# Altium PCB Main.PcbDoc
Units mil, origin at the board's own origin, x right, y up, seen from the top; angles counter-clockwise.
Board outline 1550 x 1475 mil, 2 copper layers (Top Layer, Bottom Layer); 28 components, 14 nets, 65 pads, 3 vias.
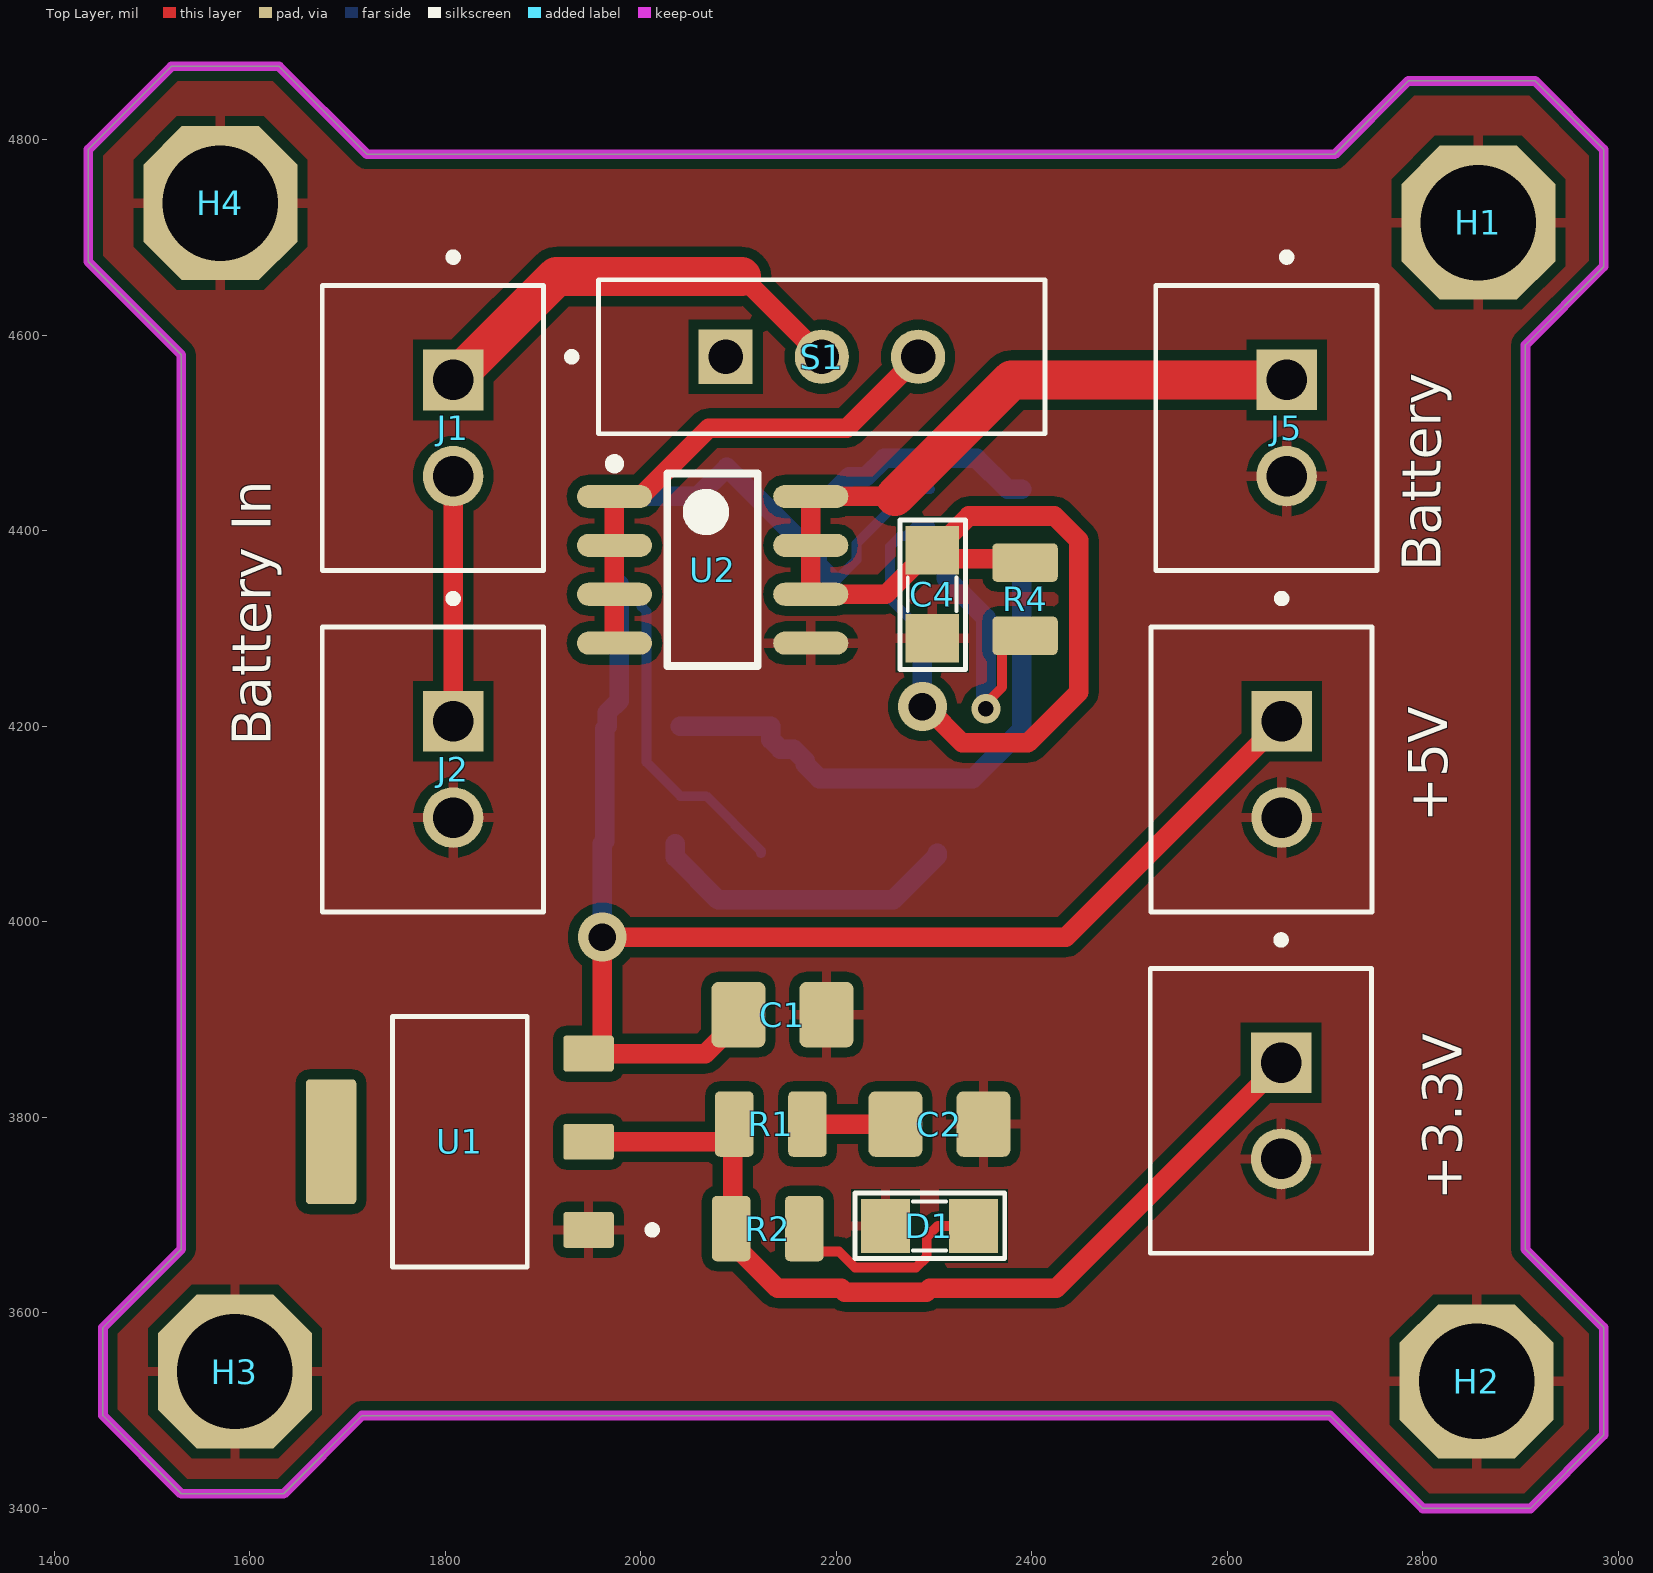
[diagram p0: Top Layer view]
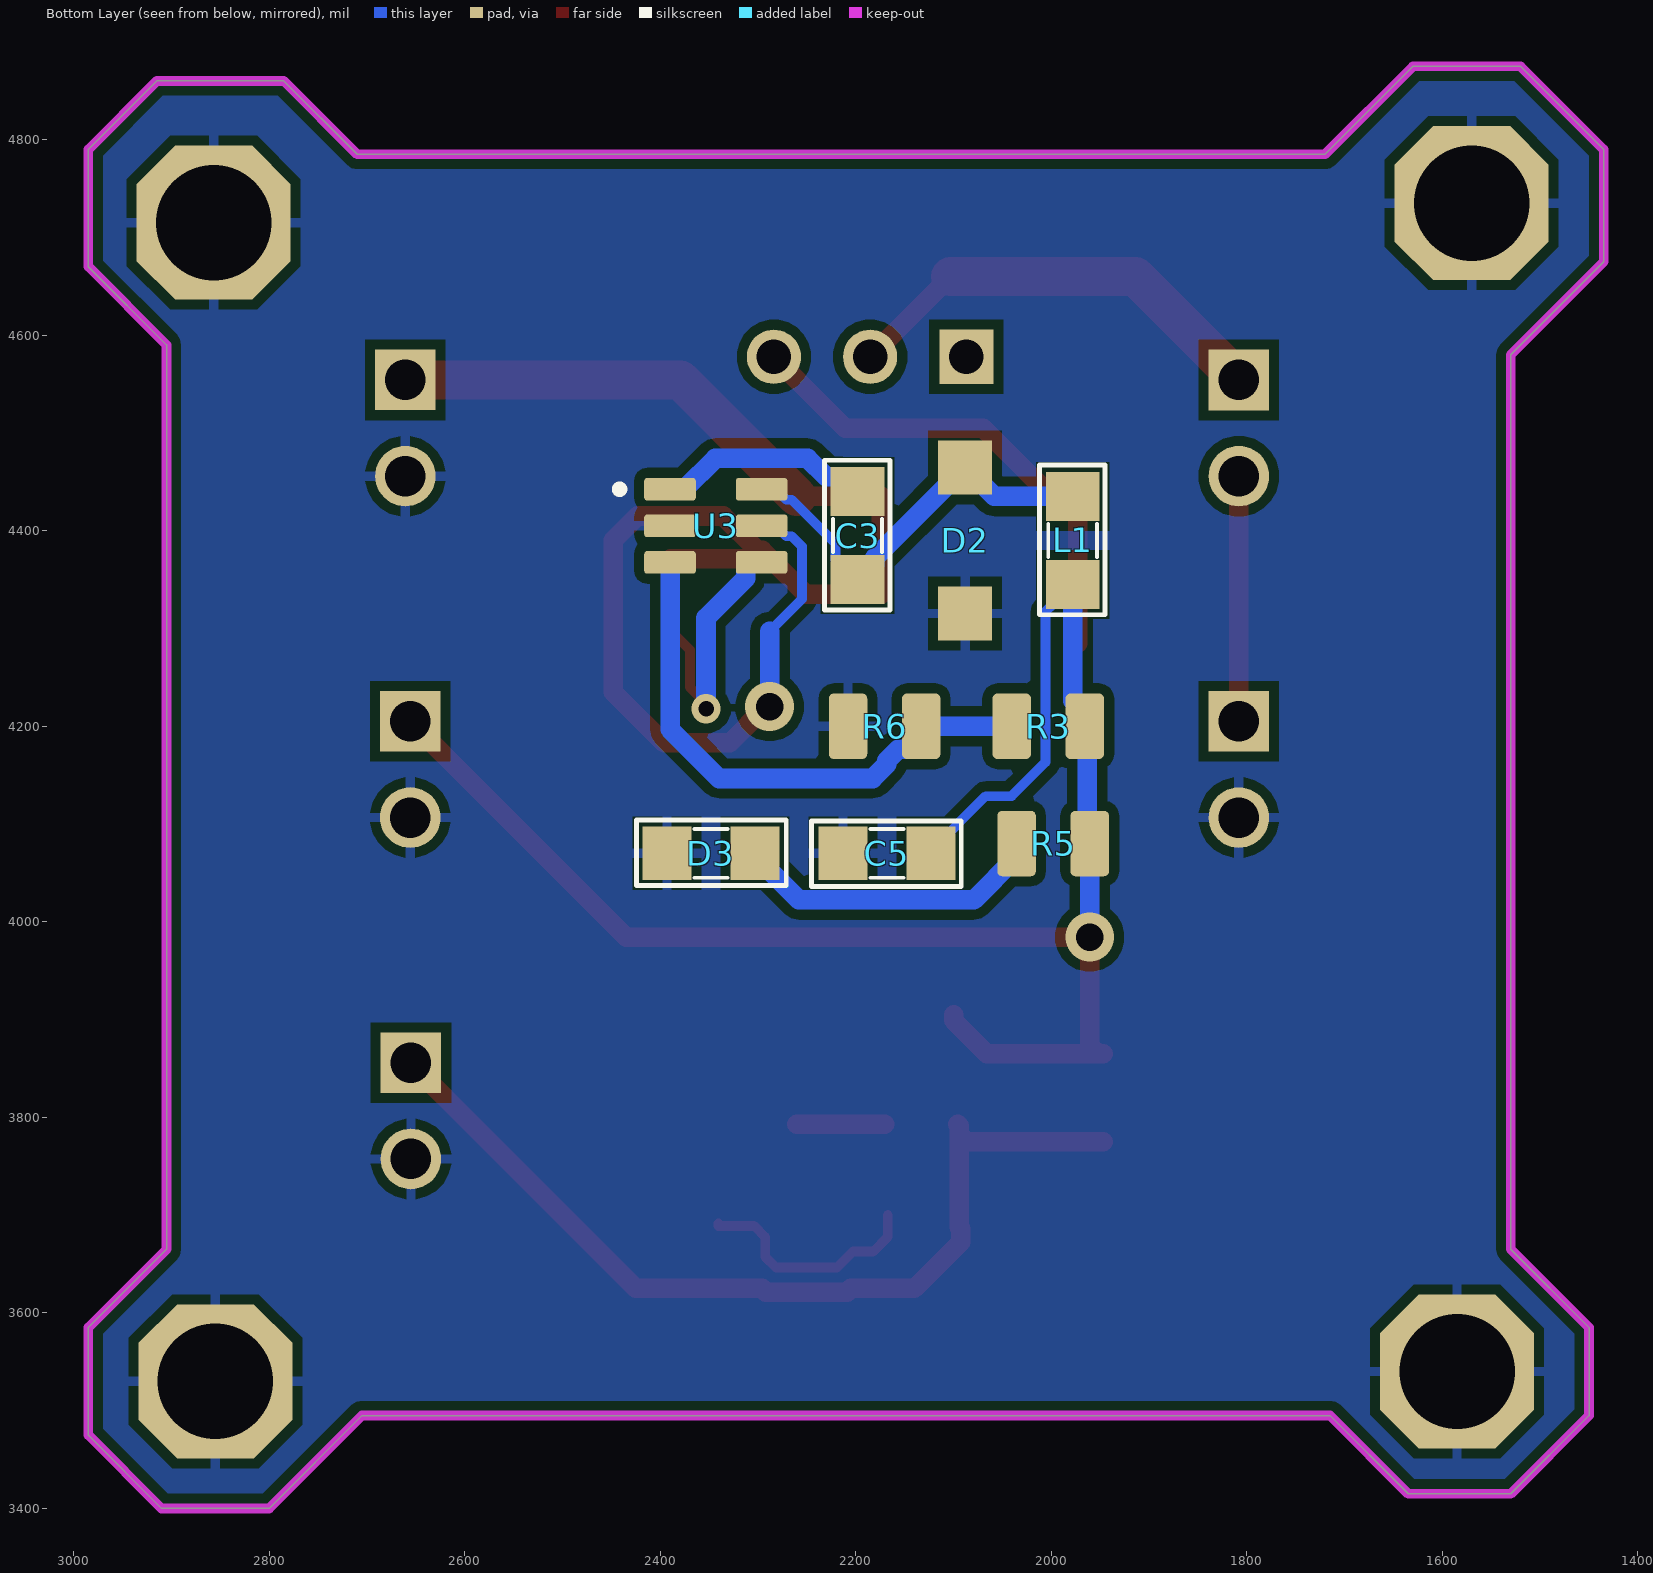
[diagram p1: Bottom Layer view, seen from below]
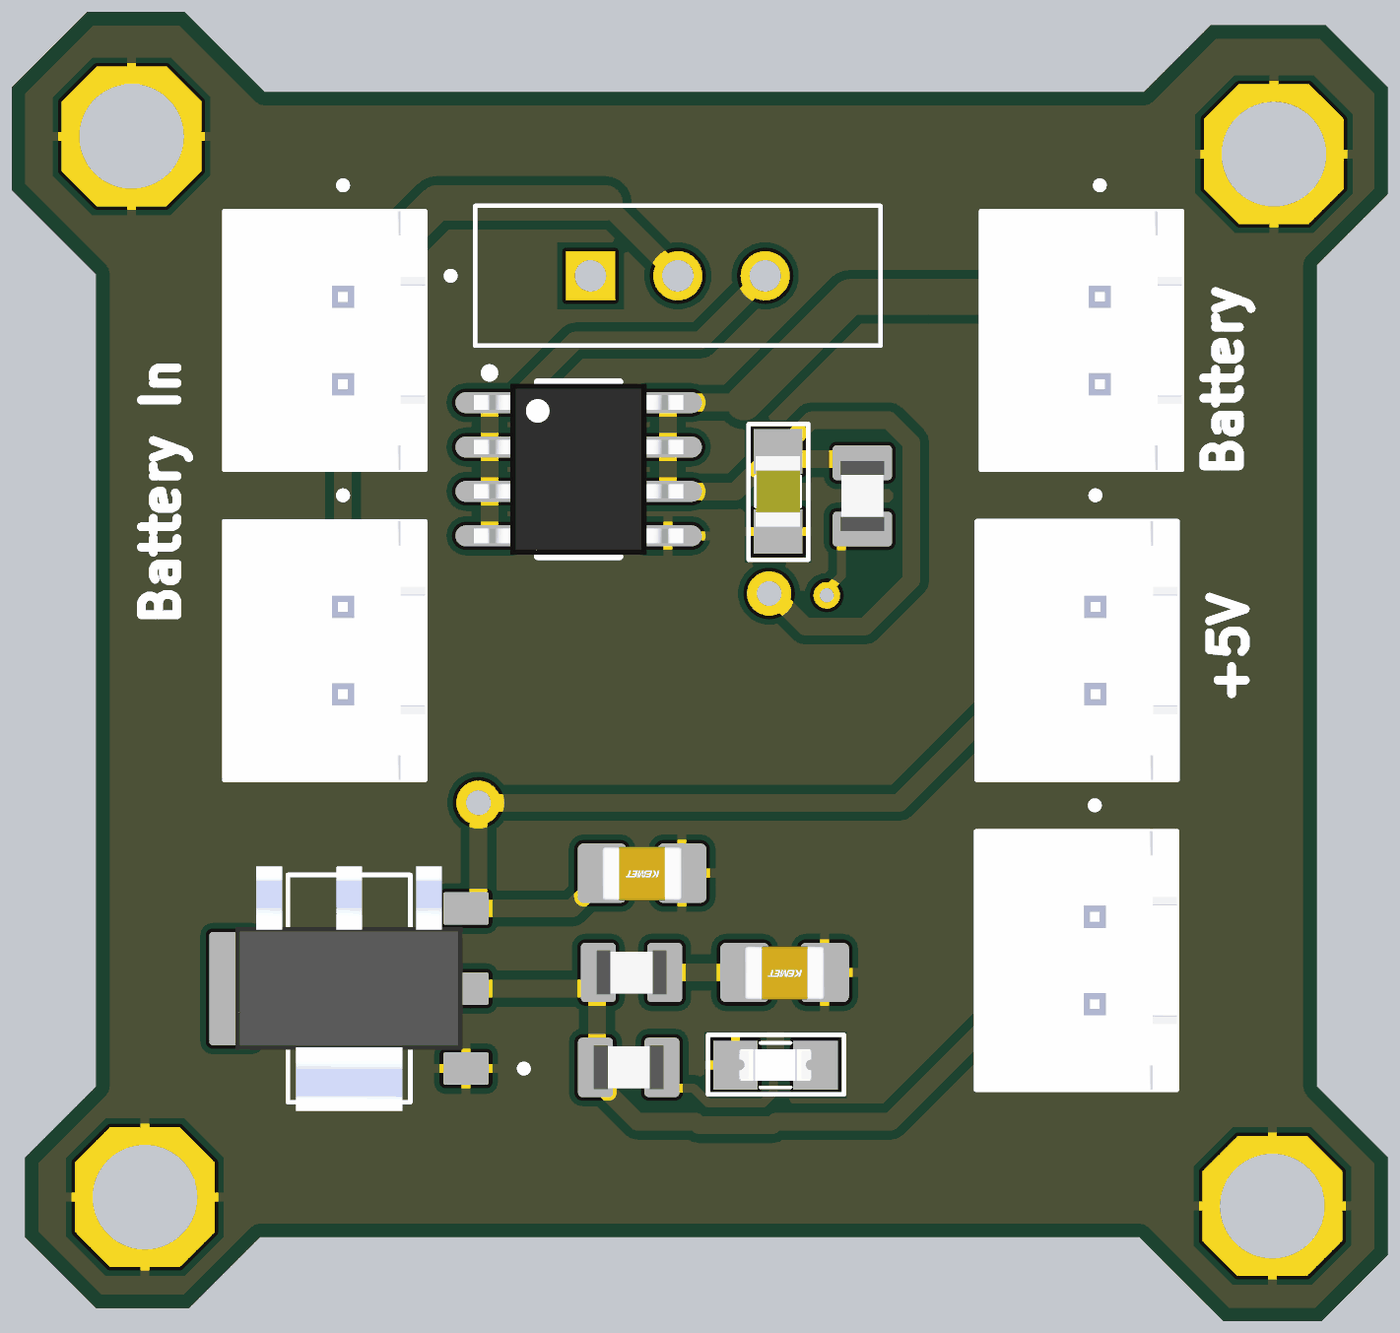
[diagram p2: 3D render of the assembled board from above, using the file's embedded part models]
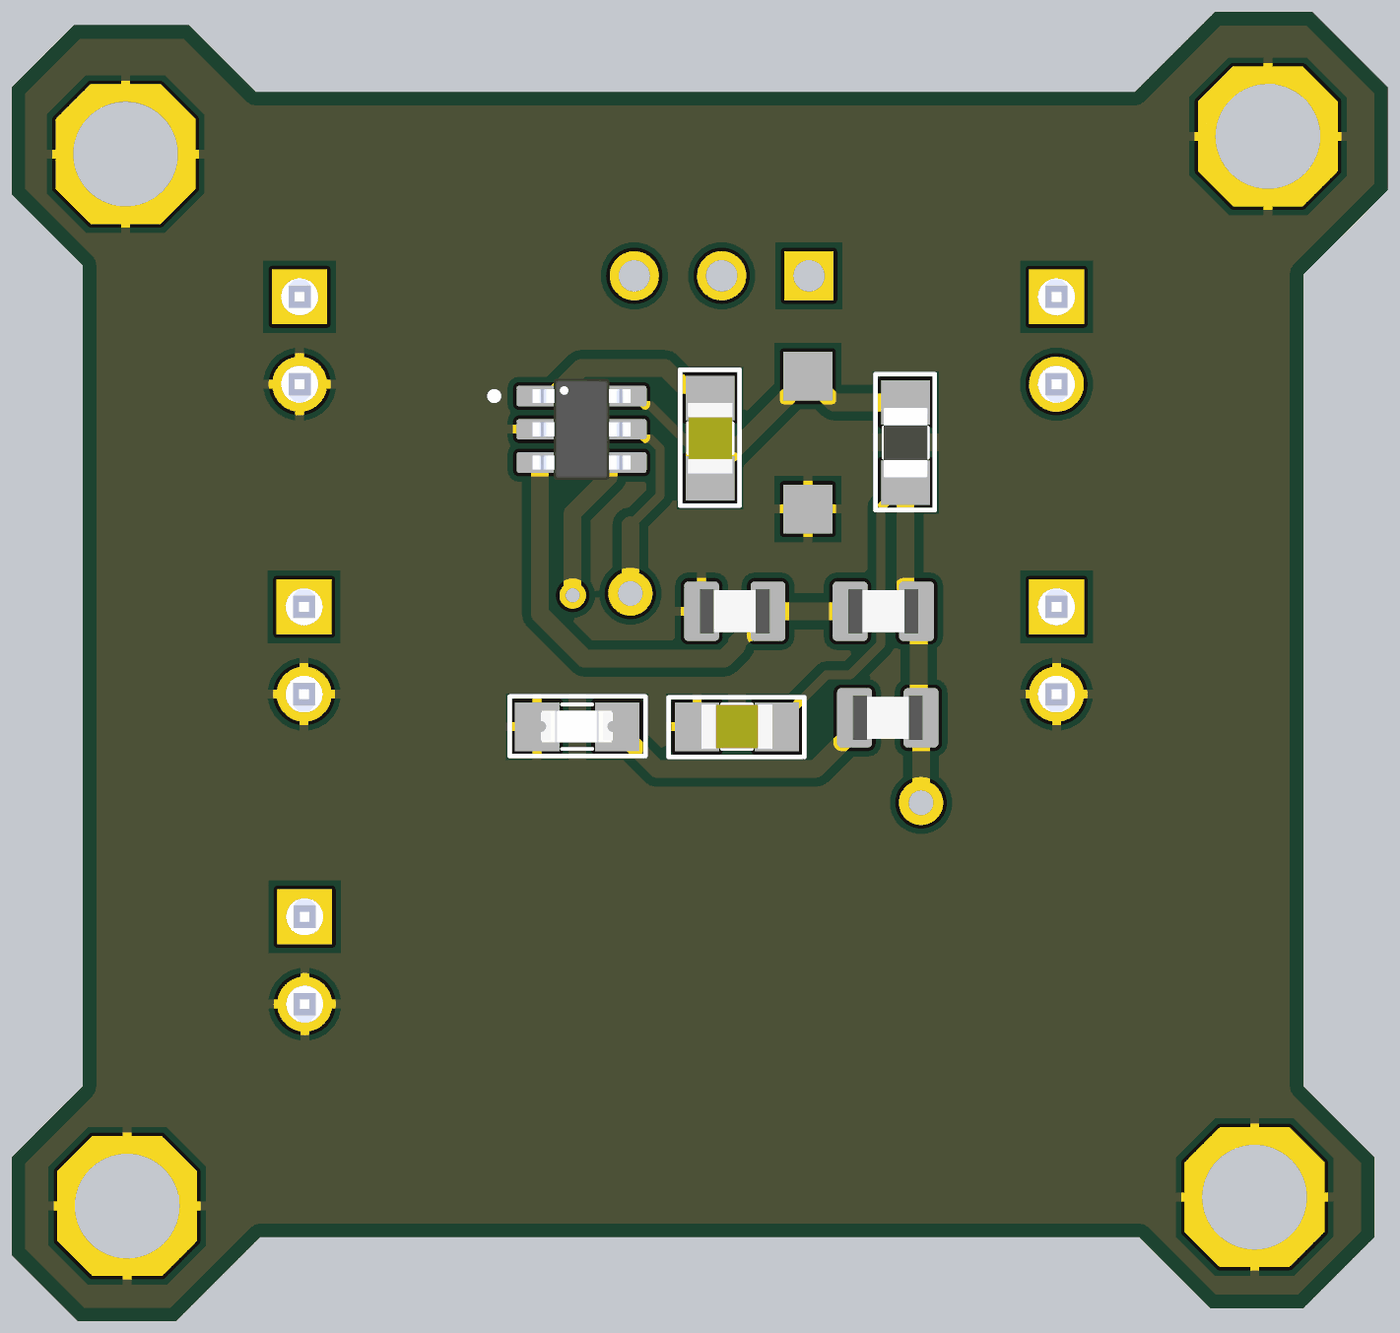
[diagram p3: 3D render of the assembled board from below, using the file's embedded part models]

## Layer stack, top to bottom
Top Solder: solder mask 0.4, Solder Resist, Dk 3.5
Top Layer: signal copper 1.4
Dielectric 1: dielectric 12.6, FR-4, Dk 4.8
Bottom Layer: signal copper 1.4
Bottom Solder: solder mask 0.4, Solder Resist, Dk 3.5

## Board outline
1530,3415 1635,3415 1715,3495 2705,3495 2800,3400 2910,3400 2985,3475 2985,3585 2905,3665 2905,4590 2985,4670 2985,4790 2915,4860 2785,4860 2710,4785 1720,4785 1630,4875 1520,4875 1435,4790 1435,4675 1530,4580 1530,3665 1450,3585 1450,3495

## Design rules (kind name [scope] priority, off if disabled: settings)
Clearance [All] p1: gap=10 ignorepadtopadclearanceinfootprint=FALSE
PolygonConnect [All] p1: connectstyle=Relief reliefconductorwidth=10 reliefentries=4 polygonreliefangle="90 Angle" airgapwidth=10
RoutingVias [All] p1: holewidth=28 width=50 viastyle="Through Hole" minholewidth=28 minwidth=50 maxholewidth=28 maxwidth=50
SolderMaskExpansion [All] p1: expansion=4 istentingtop=FALSE
Width [All] p1: maxlimit=40 minlimit=10 preferedwidth=20
30 further rules are at their usual default settings.

## Components (designator, comment, footprint, x,y, rotation, side; value= is the part's Value field where it differs from the comment)
+5V "B2B-XH-A(LF)(SN)" JST_B2B-XH-A(LF)(SN) 2634.33,3806.63 r90 top (schematic designator J3)
Battery "B2B-XH-A(LF)(SN)" JST_B2B-XH-A(LF)(SN) 2635,4155.82 r90 top (schematic designator J4)
C1 "1uF" CAP_0805 2145,3905 r180 top
C2 "47uF" CAP_0805 2305.58,3793.1 r180 top
C3 "104" "0805 CAP" 2198.13,4395 r270 bottom
C4 "104" "0805 CAP" 2298.18,4335 r90 top
C5 "104" "0805 CAP" 2168.13,4070 r180 bottom
D1 "LED-GREEN" "LED SMD 0805" 2295,3686.2 r180 top
D2 "B5819W" SOD-123 2088.13,4390 r270 bottom
D3 "LED" "LED SMD 0805" 2348.53,4067.42 r0 bottom
H1 "HOLE" HOLE 2856.77,4715 r0 top
H2 "HOLE" HOLE 2855,3530 r0 top
H3 "HOLE" HOLE 1585,3540 r180 top
H4 "HOLE" HOLE 1570,4735 r0 top
J1 "BattConn1" JST_B2B-XH-A(LF)(SN) 1787.51,4504.97 r90 top
J2 "BattConn2" JST_B2B-XH-A(LF)(SN) 1787.51,4155.79 r90 top
J5 "B2B-XH-A(LF)(SN)" JST_B2B-XH-A(LF)(SN) 2640,4505 r90 top
L1 "INDUCTOR" "INDUCTOR 0805" 1978.13,4390 r270 bottom
R1 "1k" RES_0805 2133.18,3793.1 r180 top value="R1/4W - 1K"
R2 "1k" RES_0805 2130,3686.2 r180 top value="R1/4W - 1K"
R3 "1k" RES_0805 2003.13,4200 r180 bottom value="R1/4W - 1K"
R4 "1k" RES_0805 2393.13,4330 r90 top value="R1/4W - 1K"
R5 "1k" RES_0805 1998.13,4080 r180 bottom value="R1/4W - 1K"
R6 "1k" RES_0805 2170.54,4200 r180 bottom value="R1/4W - 1K"
S1 "MINI-SPDT-SW" SW_MINI-SPDT-SW 2185.32,4577.88 r0 top
U1 "AMS1117-3.3" SOT229P700X180-4N 1815,3775 r180 top
U2 "RS3E075AT" "SOIC 8PIN" 2073.57,4360 r0 top
U3 "MP2359DJ-LF-Z" SOT95P280X100-6N 2343.13,4405 r180 bottom

## Footprints (in the part's own frame and the unit in brackets; to place one, negate y for a bottom-side part, rotate by r counter-clockwise, add the part's x,y. Pads: shape width x height; smd on the part's side, far side on the other; paste and mask are expansions set on the pad)
"0805 CAP" [mil] "Compoment SMD 80x50mil"
  rect 50x55 smd: 1(-45,0) 2(45,0)
  silkscreen extent -77,-34 76,33, body extent -40,-25 40,25, height 24
CAP_0805 [mm]
  rrect25% 1.4x1.7 smd: 1(-1.143,0) 2(1.143,0)
  body extent -1.15,-0.76 1.15,0.79, height 1.01
HOLE [mm]
  oct 4x4 hole 3: H(0,0)
"INDUCTOR 0805" [mil]
  rect 50x55 smd: 1(-45,0) 2(45,0)
  silkscreen extent -77,-34 76,33, body extent -39,-25 39,25, height 20
JST_B2B-XH-A(LF)(SN) [mm]
  rect 1.575x1.575 / inner round 1.575 / far side rect 1.575x1.575 hole 1.05: 1(1.25,-0.525)
  round 1.575 hole 1.05: 2(-1.25,-0.525)
  silkscreen extent -3.7,-2.88 4.54,2.88, body extent -3.7,-2.88 3.7,2.88, height 7
"LED SMD 0805" [mil] "Compoment SMD 80x50mil"
  rect 50x55 smd: 1(-45.39,-2.58) 2(44.61,-2.58)
  silkscreen extent -77,-37 76,30, body extent -41,-21 41,15, height 33
RES_0805 [mm]
  rrect25% 1x1.7 smd: 1(-0.95,0) 2(0.95,0)
  body extent -1,-0.63 1,0.63, height 0.47
SOD-123 [mm]
  rect 1.4x1.4 smd: A(1.9,0) C(-1.9,0)
"SOIC 8PIN" [mm]
  oval 1.95x0.6 smd: 1(-2.55,1.905) 2(-2.55,0.635) 3(-2.55,-0.635) 4(-2.55,-1.905) 5(2.55,-1.905) 6(2.55,-0.635) 7(2.55,0.635) 8(2.55,1.905)
  silkscreen extent -2.67,-2.5 1.17,2.88, body extent -3,-2.45 3,2.45, height 1.75
SOT95P280X100-6N [mm]
  rrect25% 1.34x0.59 smd: 1(-1.19,0.95) 2(-1.19,0) 3(-1.19,-0.95) 4(1.19,-0.95) 5(1.19,0) 6(1.19,0.95)
  silkscreen extent -2.6,0.85 -2.4,1.05, body extent -1.4,-1.45 1.4,1.45, height 1
SOT229P700X180-4N [mm]
  rrect15% 1.31x0.93 smd: 1(-3.345,2.29) 2(-3.345,0) 3(-3.345,-2.29)
  rrect15% 1.31x3.24 smd: 4(3.345,0)
  silkscreen extent -5.1,-3.25 1.75,3.25, body extent -3.25,-3.5 3.25,3.5, height 1.8
SW_MINI-SPDT-SW [mm]
  rect 1.408x1.408 hole 0.9: 1(-2.5,0)
  round 1.408 hole 0.9: 2(0,0) 3(2.5,0)
  silkscreen extent -6.6,-2 5.8,2

## Part data
+5V Battery J5: "Connector Header Through Hole 2 position 0.098 (2.50mm)", Package=None, Check_prices=https://www.snapeda.com/parts/B2B-XH-A(LF)(SN)/JST/view-part/?ref=eda, MF="JST Sales", MP=B2B-XH-A(LF)(SN), SnapEDA_Link=https://www.snapeda.com/parts/B2B-XH-A(LF)(SN)/JST/view-part/?ref=snap
C1 C2 C3 C4 C5: library part "CAP CERAMIC", LatestRevisionDate=17-Jul-2002, LatestRevisionNote="Re-released for DXP Platform.", PackageReference=RAD-0.3, Published=8-Jun-2000, Publisher="Altium Limited"
D1: library part LED
D2: Package="SOD-123 Taiwan Semiconductor", Availability=Unavailable, MF="Taiwan Semiconductor", MP=B5819W, Price=None, SnapEDA_Link=https://www.snapeda.com/parts/B5819W/Taiwan%20Semiconductor/view-part/105688/?ref=snap
J1 J2: library part B2B-XH-A(LF)(SN), "Connector Header Through Hole 2 position 0.098 (2.50mm)", Package=None, Check_prices=https://www.snapeda.com/parts/B2B-XH-A(LF)(SN)/JST/view-part/?ref=eda, MF="JST Sales", MP=B2B-XH-A(LF)(SN), SnapEDA_Link=https://www.snapeda.com/parts/B2B-XH-A(LF)(SN)/JST/view-part/?ref=snap
R1 R2 R3 R4 R5 R6: library part RESISTOR
S1: "Simple breadboard friendly SPDT slide switch. Rated at 30V/200mA with operating force of 250 +/-100gf.", Package=None, Availability=Unavailable, MP=MINI-SPDT-SW, Price=None
U1: "Sot223/Pkg 1-Amp 3.3-Volt Low Drop Out Voltage Regulatator", Package="SOT-223 Seeed Technology", Check_prices=https://www.snapeda.com/parts/AMS1117-3.3/Advanced+Monolithic+Systems/view-part/?ref=eda, MF="Advanced Monolithic Systems", MP=AMS1117-3.3, SnapEDA_Link=https://www.snapeda.com/parts/AMS1117-3.3/Advanced+Monolithic+Systems/view-part/?ref=snap
U2: library part L7660
U3: "Buck Switching Regulator IC Positive Adjustable 0.81V 1 Output 1.2A SOT-23-6 Thin, TSOT-23-6", Package="TSOT-23-6 Monolithic Power Systems", Check_prices=https://www.snapeda.com/parts/MP2359DJ-LF-Z/Monolithic+Power+Systems+Inc./view-part/?ref=eda, MF="Monolithic Power", MP=MP2359DJ-LF-Z, SnapEDA_Link=https://www.snapeda.com/parts/MP2359DJ-LF-Z/Monolithic+Power+Systems+Inc./view-part/?ref=snap

## Via types
v1: diameter 50, hole 28, Top Layer to Bottom Layer, 2 vias
v2: diameter 30, hole 16, Top Layer to Bottom Layer, 1 vias

## Nets (pads, with @x,y where several pads share a name; then routed paths per layer and width w, separated by ;. In a path a pad name is that pad's centre, name@x,y a point inside that pad or via, vN(x,y) a via of type N, cw(c..) or ccw(c..) an arc to the next point about the centre after c; other vN are vias at no path point)
+3.3: +5V.1 R1.2 R2.2 U1.2 | length 954.1
  Top Layer w20: U1.2 2086.09,3775 R1.2@2094.19,3783.1 ; R1.2 2094.19,3791.51 R1.2@2094.19,3783.1 ; +5V.1 2634,3834.84 2634,3834 2425,3625 2295.69,3625 2291.96,3621.28 2208.83,3621.28 2205.1,3625 2140.02,3625 2092.6,3672.42 R2.2 2094.19,3687.79 2094.19,3775 R1.2@2094.19,3783.1
+5: Battery.1 C1.2 C5.2 L1.2 R3.2 R5.2 U1.3 | length 1802.2
  Top Layer w20: U1.3 U1.3@1952.43,3865.16 ; C1.2 2100,3899.09 2066.06,3865.16 U1.3@1952.43,3865.16 ; Battery.1 2434.91,3984.27 v1(1960.73,3984.27) 1960.73,3873.46 U1.3@1952.43,3865.16
  Bottom Layer w10: L1.2 1980.63,4345 2000.63,4325 2000.63,4322.5 2005.85,4317.28 2005.85,4163.2 2040.59,4128.46 2067.17,4128.46 2123.13,4072.5 C5.2
  Bottom Layer w20: v1(1960.73,3984.27) R5.2 1963.23,4082.5 1963.23,4197.5 R3.2 1965.73,4213.78 1978.13,4226.18 L1.2
BATT: C4.2 J5.1 R4.2 U2.6 U2.7 U2.8 U3.5 | length 1641.6
  Top Layer w20: 2260,4435 U2.8 U2.7 U2.6 2250.68,4335 2295.68,4380 C4.2 ; v1(2288.18,4220) 2291.83,4220 2328.89,4182.93 2396.11,4182.93 2448.18,4235 2448.18,4390 2423.18,4415 2335.68,4415 2300.68,4380 C4.2 ; C4.2@2291.93,4371.2 2389.34,4371.2 R4.2 ; C4.2@2301.98,4376.2 C4.2
  Top Layer w40: 2260,4435 2379.21,4554.21 J5.1
  Bottom Layer w10: 2288.18,4296.92 2254.91,4330.19 2254.91,4383.72 2265.39,4394.21 2270.73,4394.21 2281.52,4405 U3.5
  Bottom Layer w20: v1(2288.18,4220) 2288.18,4296.92
GND: +5V.2 Battery.2 C1.1 C2.1 C4.1 C5.1 D1.2 D2.A D3.2 H1.H H2.H H3.H H4.H J2.2 J5.2 R6.1 U1.1 U2.5 U3.2
NetC2_2: C2.2 R1.1 | length 90
  Top Layer w20: R1.1 C2.2
NetC3_1: C3.1 U3.1 | length 219
  Bottom Layer w20: C3.1 2213.13,4455 2230.16,4455 2249.18,4474.02 2343.61,4474.02 2375.22,4442.4 U3.1
NetC3_2: C3.2 D2.C L1.1 U3.6 | length 430.5
  Bottom Layer w10: C3.2@2195.63,4350 C3.2 2200.63,4350 2220.63,4370 2220.63,4386.85 2265.39,4431.61 2270.73,4431.61 2281.52,4442.4 U3.6
  Bottom Layer w20: L1.1 2058.33,4435 D2.C 2180.63,4372.3 2180.63,4365 C3.2@2195.63,4350
NetD1_1: D1.1 R2.1 | length 240.5
  Top Layer w10: R2.1@2167.4,3699.98 R2.1 2167.4,3677.34 2182.09,3662.66 2202.8,3662.66 2219.18,3646.28 2281.61,3646.28 2292.69,3657.36 2292.69,3677.69 2303.78,3688.78 D1.1 D1.1@2340.39,3691.28
NetD3_1: D3.1 R5.1 | length 320.6
  Bottom Layer w20: R5.1 2035.54,4066.22 2079.26,4022.5 2258.13,4022.5 2303.13,4067.5 D3.1
NetJ1_1: J1.1 S1.2 | length 455
  Top Layer w20: 2103.18,4660 S1.2
  Top Layer w40: J1.1 1914,4660 2103.18,4660
NetJ1_2: J1.2 J2.1 | length 250.8
  Top Layer w20: J2.1 J1.2
NetR3_1: R3.1 R6.2 U3.3 | length 573.4
  Bottom Layer w20: R3.1 R6.2 2133.13,4186.22 2142.82,4176.54 2156.54,4176.54 2168.25,4164.82 2168.25,4161.13 2182.85,4146.54 2339.67,4146.54 2389.98,4196.85 U3.3
NetR4_1: R4.1 U3.4 | length 278.3
  Top Layer w10: v2(2353.11,4217.93) 2353.11,4223.34 2369.59,4239.82 2369.59,4277.91 2384.28,4292.6 R4.1
  Bottom Layer w20: U3.4 2311.05,4367.6 2312.66,4365.98 2312.66,4351.22 2353.18,4310.7 2353.18,4218 v2(2353.11,4217.93)
NetS1_3: S1.3 U2.1 U2.2 U2.3 U2.4 | length 519.7
  Top Layer w20: U2.4 U2.3 U2.2 U2.1 1999.75,4435 2069.75,4505 2210.86,4505 S1.3
pads on no net: S1.1 U1.4

## Polygon pours and split planes (outlines as drawn)
GND on Bottom Layer "GND_L02_P003" (solid, pour order 3): 2710,4785 2785,4860 2912.5,4860 2985,4787.5 2985,4675 2905,4595 2905,3665 2985,3585 2985,3475 2910,3400 2795,3400 2700,3495 1720,3495 1640,3415 1530,3415 1450,3495 1450,3590 1455,3590 1530,3665 1530,4575 1435,4670 1435,4787.5 1522.5,4875 1630,4875 1720,4785
GND on Top Layer "GND_L01_P002" (solid, pour order 2): 2710,4785 2785,4860 2910,4860 2980,4790 2985,4790 2985,4675 2905,4595 2905,3665 2985,3585 2985,3480 2910,3405 2910,3400 2805,3400 2710,3495 1720,3495 1640,3415 1530,3415 1450,3495 1450,3590 1525,3665 1530,3665 1530,4575 1435,4670 1435,4785 1520,4870 1520,4875 1630,4875 1720,4785 1720,4780

## Keep-outs
Keep-Out Layer:
  the board outline again, w10

## Silkscreen, mask and mechanical layers (free items; w line width, h text height)
Top Overlay:
  text "Battery In" at 1621.67,4180 h40 r90
  text "+3.3V" at 2840,3715 h40 r90